# Altium PCB Evaluation kit.PcbDoc
Units mm, origin at the board's own origin, x right, y up, seen from the top; angles counter-clockwise.
Board outline 101.18 x 98.62 mm, 2 copper layers (Top Layer, Bottom Layer); 87 components, 56 nets, 195 pads, 0 vias.
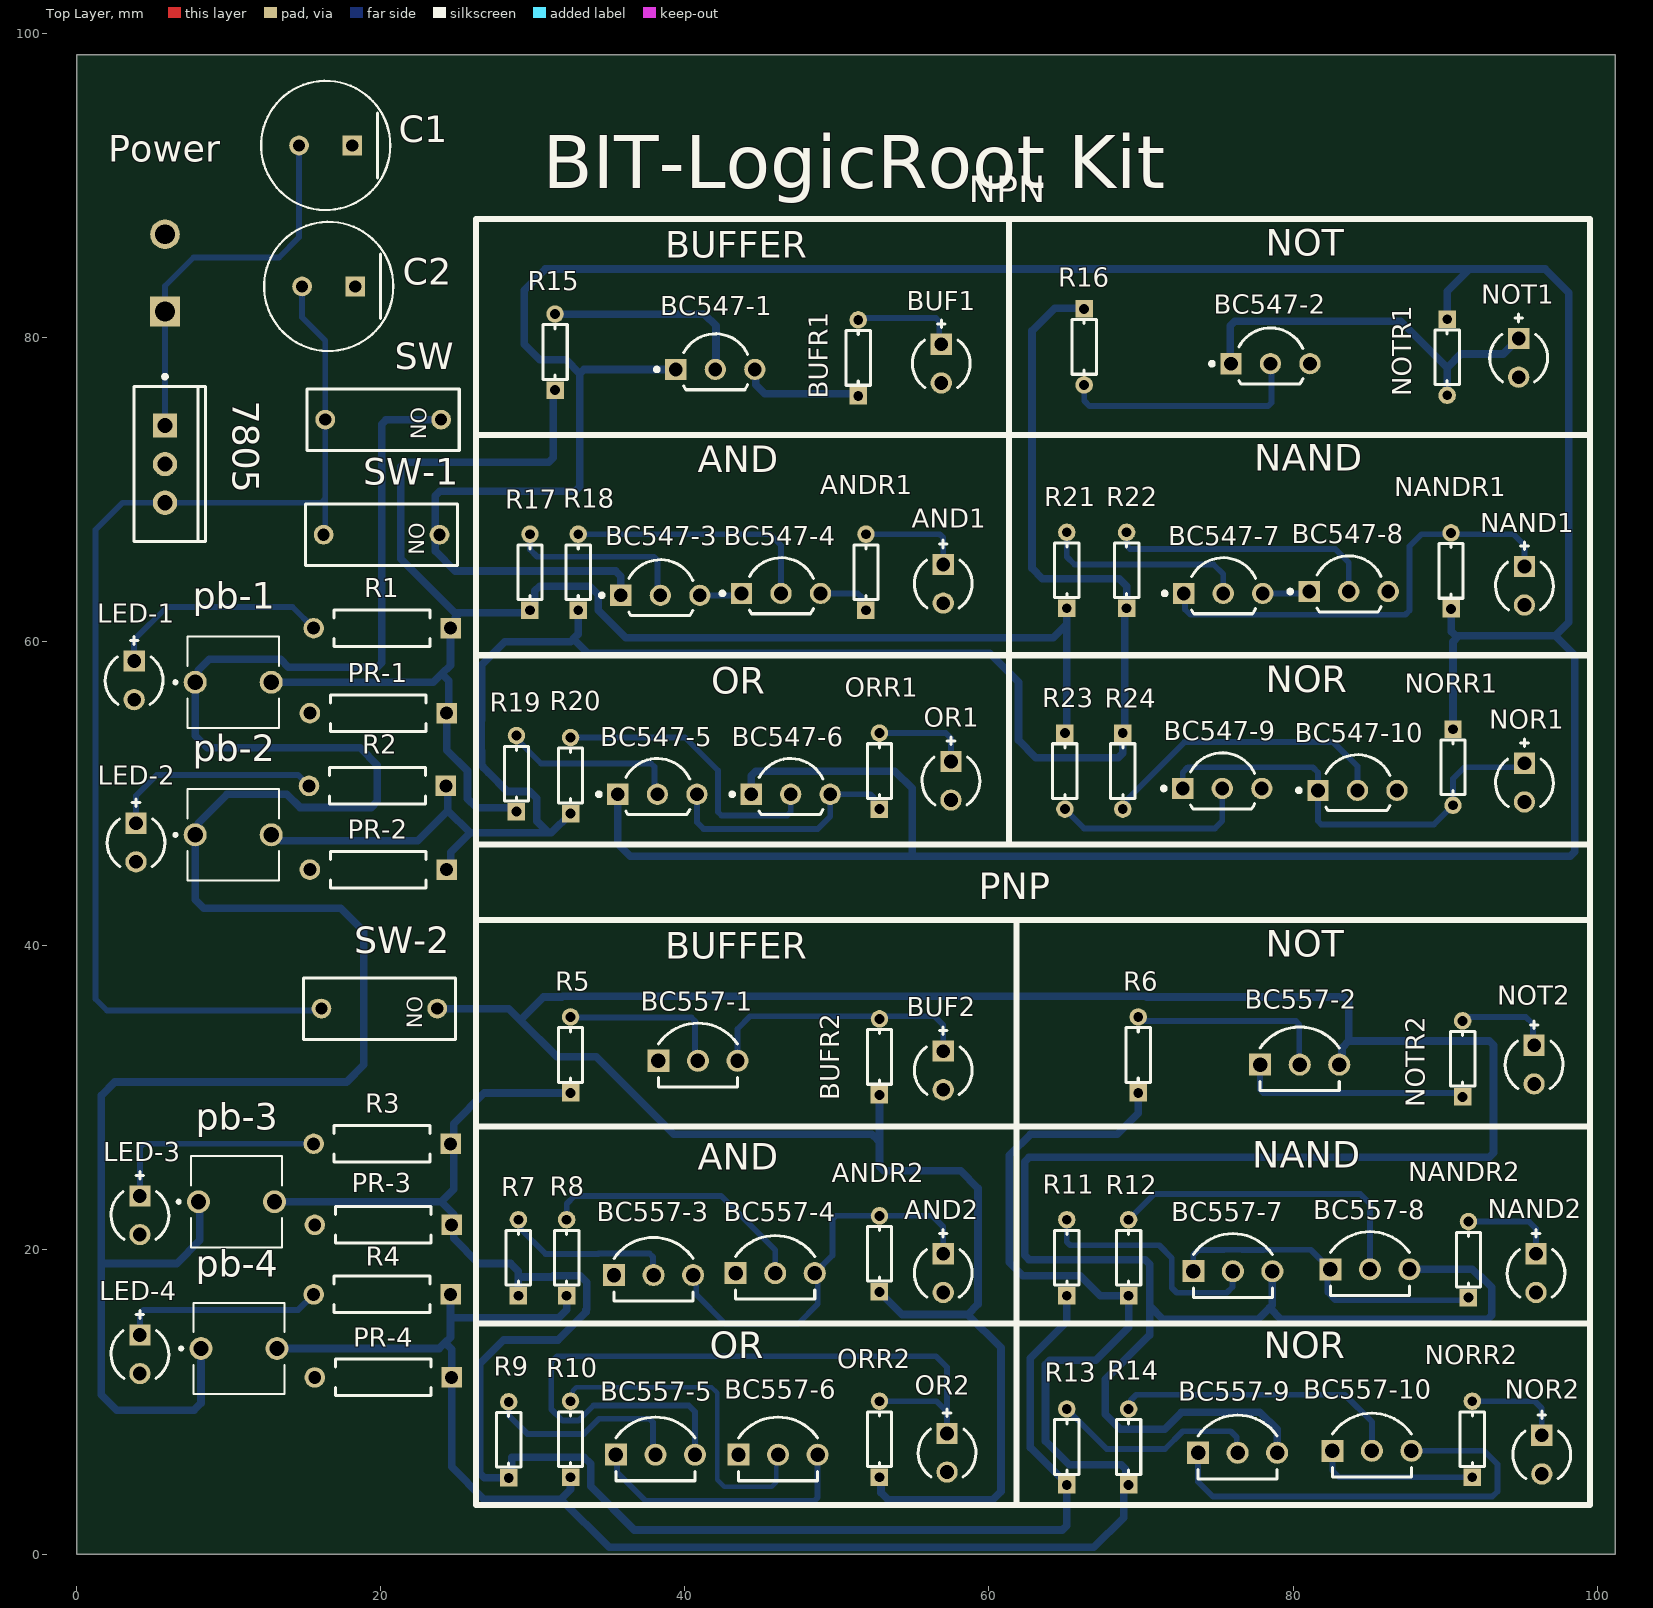
[diagram p0: Top Layer view]
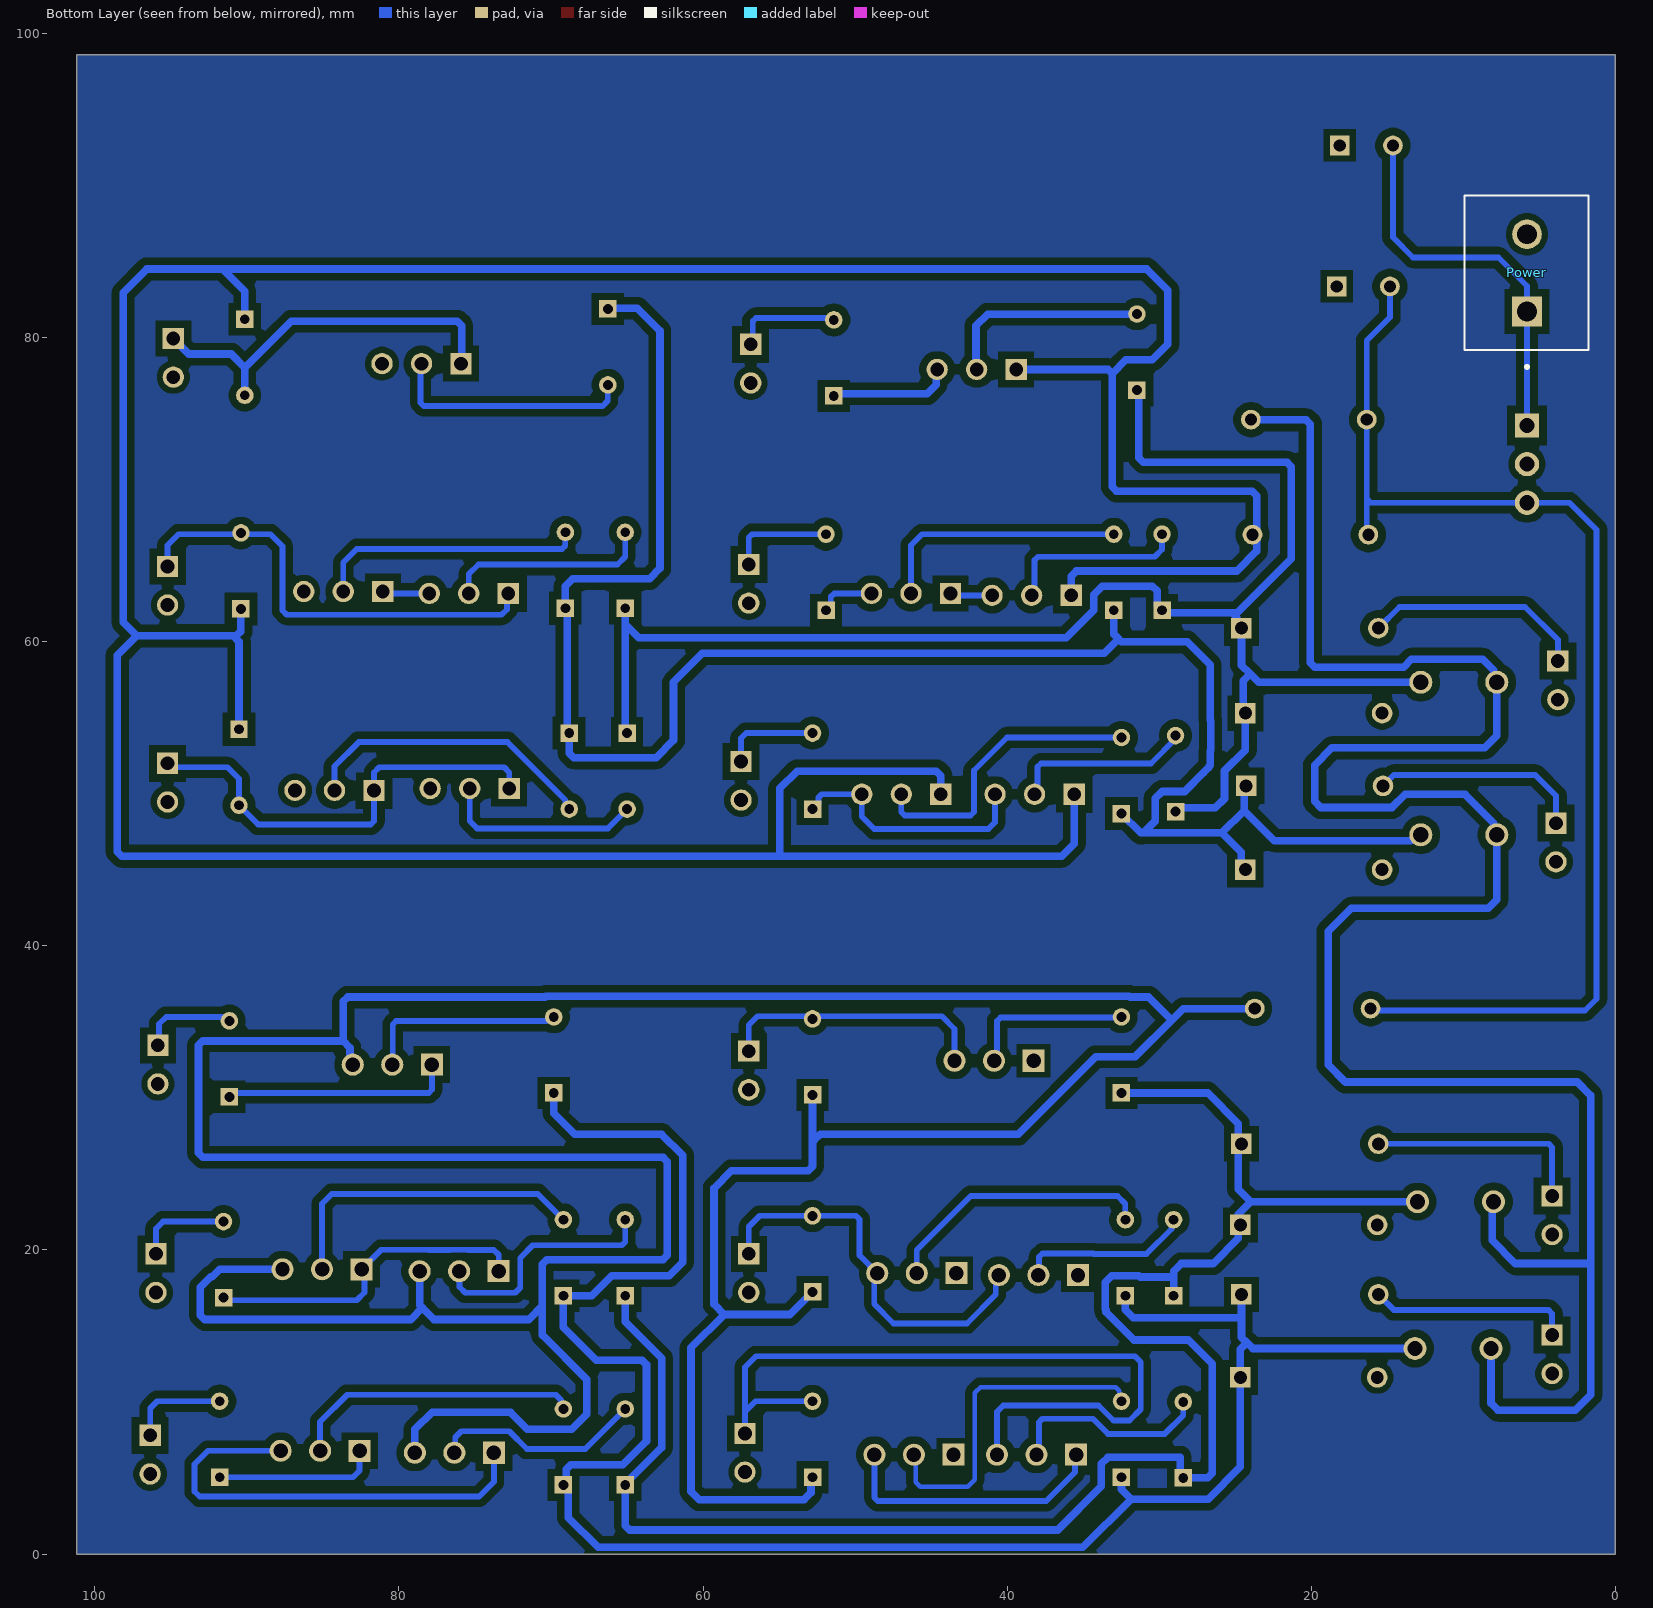
[diagram p1: Bottom Layer view, seen from below]
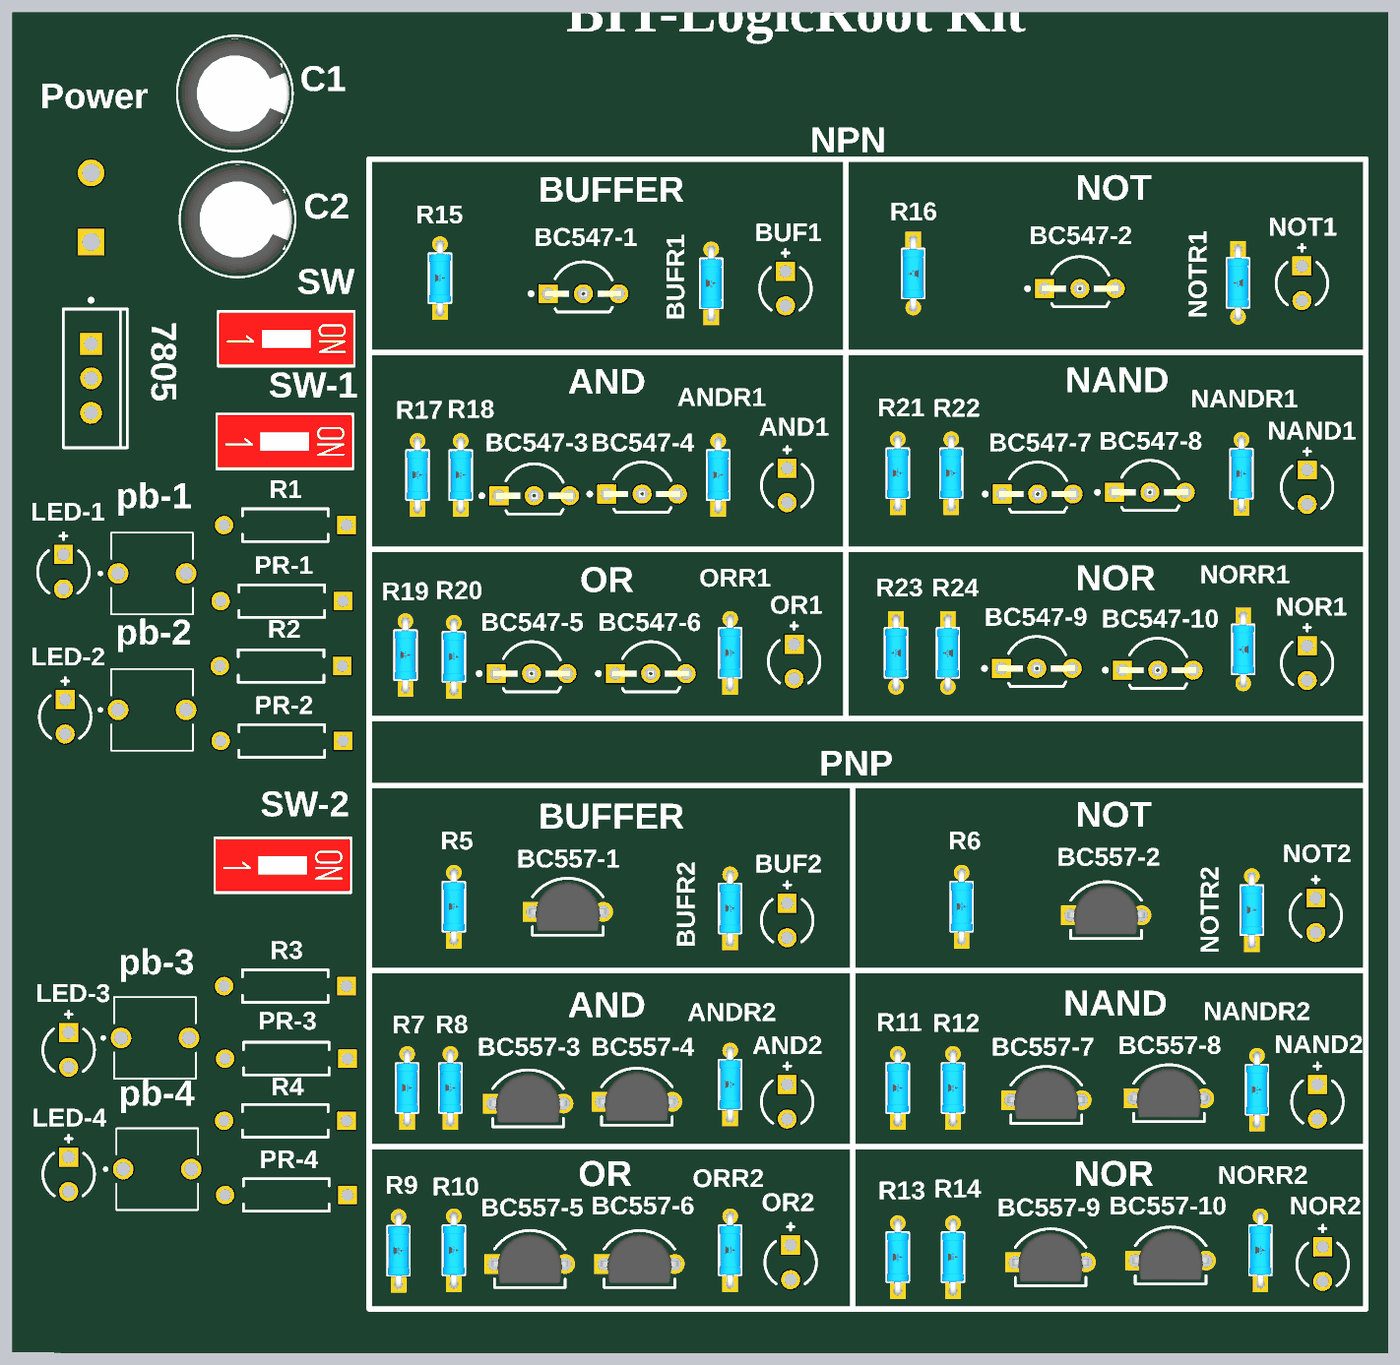
[diagram p2: 3D render of the assembled board from above, using the file's embedded part models]

## Layer stack, top to bottom
Top Solder: solder mask 0.0102, Solder Resist, Dk 3.5
Top Layer: signal copper 0.0356
Dielectric 1: dielectric 0.32, FR-4, Dk 4.8
Bottom Layer: signal copper 0.0356
Bottom Solder: solder mask 0.0102, Solder Resist, Dk 3.5

## Board outline
0.011,0 101.189,-0.012 101.189,98.603 0.011,98.603

## Design rules (kind name [scope] priority, off if disabled: settings)
Clearance [All] p1: gap=0.5 ignorepadtopadclearanceinfootprint=FALSE
PolygonConnect [All] p1: connectstyle=Relief reliefconductorwidth=0.5 reliefentries=4 polygonreliefangle="90 Angle" airgapwidth=0.4
RoutingVias [All] p1: holewidth=0.711 width=1.27 viastyle="Through Hole" minholewidth=0.711 minwidth=1.27 maxholewidth=0.711 maxwidth=1.27
SilkToSolderMaskClearance [IsPad] p1: minsilkscreentomaskgap=0 clearancetoexposedcopper=TRUE
SolderMaskExpansion [All] p1: expansion=0.102 istentingtop=FALSE
Width width [All] p1: maxlimit=0.5 minlimit=0.3 preferedwidth=0.3
Width vcc [All] p2: maxlimit=0.6 minlimit=0.5 preferedwidth=0.5
29 further rules are at their usual default settings.

## Components (designator, comment, footprint, x,y, rotation, side; value= is the part's Value field where it differs from the comment)
7805 "LM7805ACT" FAIR-TO-220-3 5.812,71.686 r0 top
AND1 "LTL-1CHE" INDPR60-254-520X380X650 56.993,63.812 r270 top
AND2 "LTL-1CHE" INDPR60-254-520X380X650 56.993,18.473 r270 top
ANDR1 "MBA02040C2200FC100" FP-MBA0204-MFG 51.913,64.574 r90 top value=220Ω
ANDR2 "MBA02040C2200FC100" FP-MBA0204-MFG 52.802,19.743 r90 top value=220Ω
BC547-1 "BC547BRL1G" ONSC-TO-92-3-29-11_AM_BL 42.007,77.909 r0 top
BC547-2 "BC547BRL1G" ONSC-TO-92-3-29-11_AM_BL 78.516,78.29 r0 top
BC547-3 "BC547BRL1G" ONSC-TO-92-3-29-11_AM_BL 38.391,63.05 r0 top
BC547-4 "BC547BRL1G" ONSC-TO-92-3-29-11_AM_BL 46.325,63.177 r0 top
BC547-5 "BC547BRL1G" ONSC-TO-92-3-29-11_AM_BL 38.197,49.969 r0 top
BC547-6 "BC547BRL1G" ONSC-TO-92-3-29-11_AM_BL 46.96,49.969 r0 top
BC547-7 "BC547BRL1G" ONSC-TO-92-3-29-11_AM_BL 75.408,63.177 r0 top
BC547-8 "BC547BRL1G" ONSC-TO-92-3-29-11_AM_BL 83.663,63.304 r0 top
BC547-9 "BC547BRL1G" ONSC-TO-92-3-29-11_AM_BL 75.348,50.35 r0 top
BC547-10 "BC547BRL1G" ONSC-TO-92-3-29-11_AM_BL 84.238,50.223 r0 top
BC557-1 "BC557BTF" FP-135AR-MFG 40.864,32.824 r90 top
BC557-2 "BC557BTF" FP-135AR-MFG 80.441,32.57 r90 top
BC557-3 "BC557BTF" FP-135AR-MFG 37.943,18.727 r90 top
BC557-4 "BC557BTF" FP-135AR-MFG 45.944,18.854 r90 top
BC557-5 "BC557BTF" FP-135AR-MFG 38.07,6.915 r90 top
BC557-6 "BC557BTF" FP-135AR-MFG 46.131,6.915 r90 top
BC557-7 "BC557BTF" FP-135AR-MFG 76.043,18.981 r90 top
BC557-8 "BC557BTF" FP-135AR-MFG 85.06,19.107 r90 top
BC557-9 "BC557BTF" FP-135AR-MFG 76.357,7.042 r90 top
BC557-10 "BC557BTF" FP-135AR-MFG 85.187,7.17 r90 top
BUF1 "LTL-1CHE" INDPR60-254-520X380X650 56.866,78.29 r270 top
BUF2 "LTL-1CHE" INDPR60-254-520X380X650 56.993,31.808 r270 top
BUFR1 "MBA02040C2200FC100" FP-MBA0204-MFG 51.405,78.671 r90 top value=220Ω
BUFR2 "MBA02040C2200FC100" FP-MBA0204-MFG 52.802,32.697 r90 top value=220Ω
C1 "EEU-FR1H101B" FP-EEU-FR1H101B-MFG 16.381,92.641 r180 top
C2 "EEU-FR1H101B" FP-EEU-FR1H101B-MFG 16.579,83.37 r180 top
LED-1 "LTL-1CHE" INDPR60-254-520X380X650 3.78,57.462 r270 top
LED-2 "LTL-1CHE" INDPR60-254-520X380X650 3.907,46.794 r270 top
LED-3 "LTL-1CHE" INDPR60-254-520X380X650 4.161,22.283 r270 top
LED-4 "LTL-1CHE" INDPR60-254-520X380X650 4.161,13.139 r270 top
NAND1 "LTL-1CHE" INDPR60-254-520X380X650 95.22,63.685 r270 top
NAND2 "LTL-1CHE" INDPR60-254-520X380X650 95.982,18.473 r270 top
NANDR1 "MBA02040C2200FC100" FP-MBA0204-MFG 90.394,64.661 r90 top value=220Ω
NANDR2 "MBA02040C2200FC100" FP-MBA0204-MFG 91.537,19.362 r90 top value=220Ω
NOR1 "LTL-1CHE" INDPR60-254-520X380X650 95.22,50.731 r270 top
NOR2 "LTL-1CHE" INDPR60-254-520X380X650 96.363,6.535 r270 top
NORR1 "MBA02040C2200FC100" FP-MBA0204-MFG 90.521,51.747 r270 top value=220Ω
NORR2 "MBA02040C2200FC100" FP-MBA0204-MFG 91.791,7.551 r90 top value=220Ω
NOT1 "LTL-1CHE" INDPR60-254-520X380X650 94.839,78.671 r270 top
NOT2 "LTL-1CHE" INDPR60-254-520X380X650 95.855,32.189 r270 top
NOTR1 "MBA02040C2200FC100" FP-MBA0204-MFG 90.14,78.711 r270 top value=220Ω
NOTR2 "MBA02040C2200FC100" FP-MBA0204-MFG 91.156,32.57 r90 top value=220Ω
OR1 "LTL-1CHE" INDPR60-254-520X380X650 57.501,50.858 r270 top
OR2 "LTL-1CHE" INDPR60-254-520X380X650 57.247,6.662 r270 top
ORR1 "MBA02040C2200FC100" FP-MBA0204-MFG 52.802,51.493 r90 top value=220Ω
ORR2 "MBA02040C2200FC100" FP-MBA0204-MFG 52.802,7.551 r90 top value=220Ω
pb-1 "BUTT-2" SW_BUTT-2 10.297,57.335 r0 top
pb-2 "BUTT-2" SW_BUTT-2 10.297,47.302 r0 top
pb-3 "BUTT-2" SW_BUTT-2 10.511,23.172 r0 top
pb-4 "BUTT-2" SW_BUTT-2 10.678,13.52 r0 top
Power "1729128" PHOENIX_1729128 1.762,79.179 r90 bottom
PR-1 "MFR-25FBF52-100R" RESA60-630X240 19.837,55.303 r180 top value=1K
PR-2 "MFR-25FBF52-100R" RESA60-630X240 19.837,45.016 r180 top value=1K
PR-3 "MFR-25FBF52-100R" RESA60-630X240 20.163,21.648 r180 top value=1K
PR-4 "MFR-25FBF52-100R" RESA60-630X240 20.163,11.615 r180 top value=1K
R1 "MFR-25FBF52-100R" RESA60-630X240 20.091,60.891 r180 top value=330
R2 "MFR-25FBF52-100R" RESA60-630X240 19.782,50.525 r180 top value=330
R3 "MFR-25FBF52-100R" RESA60-630X240 20.091,26.982 r180 top value=330
R4 "MFR-25FBF52-100R" RESA60-630X240 20.091,17.076 r180 top value=330
R5 "MBA02040C2200FC100" FP-MBA0204-MFG 32.482,32.824 r90 top value=220Ω
R6 "MBA02040C2200FC100" FP-MBA0204-MFG 69.82,32.824 r90 top value=220Ω
R7 "MBA02040C2200FC100" FP-MBA0204-MFG 29.053,19.489 r90 top value=220Ω
R8 "MBA02040C2200FC100" FP-MBA0204-MFG 32.228,19.489 r90 top value=220Ω
R9 "MBA02040C2200FC100" FP-MBA0204-MFG 28.418,7.511 r90 top value=220Ω
R10 "MBA02040C2200FC100" FP-MBA0204-MFG 32.482,7.551 r90 top value=220Ω
R11 "MBA02040C2200FC100" FP-MBA0204-MFG 65.121,19.489 r90 top value=220Ω
R12 "MBA02040C2200FC100" FP-MBA0204-MFG 69.185,19.489 r90 top value=220Ω
R13 "MBA02040C2200FC100" FP-MBA0204-MFG 65.121,7.043 r90 top value=220Ω
R14 "MBA02040C2200FC100" FP-MBA0204-MFG 69.185,7.043 r90 top value=220Ω
R15 "MBA02040C2200FC100" FP-MBA0204-MFG 31.466,79.052 r90 top value=220Ω
R16 "MBA02040C2200FC100" FP-MBA0204-MFG 66.264,79.393 r270 top value=220Ω
R17 "MBA02040C2200FC100" FP-MBA0204-MFG 29.815,64.574 r90 top value=220Ω
R18 "MBA02040C2200FC100" FP-MBA0204-MFG 32.99,64.574 r90 top value=220Ω
R19 "MBA02040C2200FC100" FP-MBA0204-MFG 28.926,51.326 r90 top value=220Ω
R20 "MBA02040C2200FC100" FP-MBA0204-MFG 32.482,51.199 r90 top value=220Ω
R21 "MBA02040C2200FC100" FP-MBA0204-MFG 65.121,64.701 r90 top value=220Ω
R22 "MBA02040C2200FC100" FP-MBA0204-MFG 69.058,64.701 r90 top value=220Ω
R23 "MBA02040C2200FC100" FP-MBA0204-MFG 64.994,51.493 r270 top value=220Ω
R24 "MBA02040C2200FC100" FP-MBA0204-MFG 68.804,51.493 r270 top value=220Ω
SW "418117170901" 418117170901 20.163,74.607 r270 top
SW-1 "418117170901" 418117170901 20.055,67.043 r270 top
SW-2 "418117170901" 418117170901 19.909,35.872 r270 top

## Footprints (in the part's own frame and the unit in brackets; to place one, negate y for a bottom-side part, rotate by r counter-clockwise, add the part's x,y. Pads: shape width x height; smd on the part's side, far side on the other; paste and mask are expansions set on the pad)
418117170901 [mm] "2.54 mm compact THT with flat actuator, 1p"
  round 1.3 hole 0.8: 1(0,-3.81) 2(0,3.81)
  silkscreen extent -2.02,-5 2.02,5, body extent -1.92,-4.95 1.92,4.95, height 5.75
FAIR-TO-220-3 [mm] "FM, 3-Leads, Body 10.2x4.7mm, Pitch 2.54mm"
  rect 1.6x1.6 hole 1: 1(0,2.54)
  round 1.6 hole 1: 2(0,0) 3(0,-2.54)
  silkscreen extent -2.04,-5.1 2.66,5.87, body extent -2.04,-5.1 2.66,5.1, height 18.95
FP-135AR-MFG [mm]
  rect 1.45x1.45 hole 0.95 paste-2539.97 mask+0: 1(-0.38,2.6)
  round 1.45 hole 0.95 paste-2539.97 mask+0: 2(-0.38,0) 3(-0.38,-2.6)
  silkscreen extent -2.09,-2.6 2.09,2.6, body extent -2.19,-3.42 2.19,3.42, height 0.25
FP-EEU-FR1H101B-MFG [mm]
  rect 1.3x1.3 hole 0.8 paste-2539.97 mask+0: 1(-1.75,0)
  round 1.3 hole 0.8 paste-2539.97 mask+0: 2(1.75,0)
  silkscreen extent -4.25,-4.25 4.25,4.25, body extent -4.35,-4.35 4.35,4.35, height 0.25
FP-MBA0204-MFG [mm]
  rect 1.15x1.15 hole 0.65 paste-2539.97 mask+0: 1(-2.5,0)
  round 1.15 hole 0.65 paste-2539.97 mask+0: 2(2.5,0)
  silkscreen extent -1.8,-0.8 1.8,0.8, body extent -3.17,-0.9 3.17,0.9, height 0.25
INDPR60-254-520X380X650 [mm] "THD, 2-Leads, Dia 3.8mm, Pitch 2.54mm"
  rect 1.4x1.4 hole 0.9: 1(-1.27,0)
  round 1.4 hole 0.9: 2(1.27,0)
  silkscreen extent -2.87,-1.9 1.58,1.9, body extent -1.9,-1.9 1.9,1.9, height 6.5
ONSC-TO-92-3-29-11_AM_BL [mm] "TO, 3-Leads, Body Dia 4.7mm, Pitch 2.6mm"
  rect 1.4x1.4 hole 0.9: 1(-2.6,0)
  round 1.4 hole 0.9: 2(0,0) 3(2.6,0)
  silkscreen extent -3.97,-1.34 2.13,2.35, body extent -2.84,-1.34 2.84,2.35, height 5.33
PHOENIX_1729128 [mm]
  rect 1.95x1.95 / inner round 1.95 / far side rect 1.95x1.95 hole 1.3: 1(2.54,4.05)
  round 1.95 hole 1.3: 2(7.62,4.05)
  silkscreen extent -1.2,0 10.16,8.15
RESA60-630X240 [mm] "Axial Resistor, 2-Leads, Dia 2.4mm, Body Length 6.3mm"
  rect 1.35x1.35 hole 0.85: 1(-4.5,0)
  round 1.35 hole 0.85: 2(4.5,0)
  silkscreen extent -3.15,-1.2 3.15,1.2, body extent -4.77,-1.19 4.77,1.2, height 2.4
SW_BUTT-2 [mm]
  round 1.508 hole 1: 1(-2.5,0) 2(2.5,0)
  silkscreen extent -3.9,-3 3,3

## Part data
7805: library part CMP-2000-04937-1, "Positive Voltage Regulator, 5 V, 1 A, 0 to 125 degC, 3-Pin TO-220, RoHS, Tube", Dropout Voltage Measurement Current=1A, Manufacturer=Fairchild, Maximum Input Voltage=35V, Maximum Operating Temperature=+125degC, Minimum Operating Temperature=0degC, Output Voltage=5V, Package Description="3-Pin Through Hole Device, Body 10 x 4.5 mm, Pitch 2.54 mm", Package Reference=TO-220, Quiescent Current=6mA, Typical Dropout Voltage @ Current=2V@1A, Datasheet URL=https://datasheet.ciiva.com/5816/1359194-5816420.pdf, Datasheet Version="Rev. 1.0.1, 05/2006", Dimensions=10.67x4.83x16.51mm, Height=16.51mm, Length=10.67mm, Line Regulation=50mV, Load Regulation=100mV, Manufacturer URL=https://www.fairchildsemi.com/, Maximum Output Current=1A, Mounting Type=ThroughHole, Number of Outputs=1, Output Type=Fixed, Package Type=TO-220, Package URL=https://www.fairchildsemi.com/package-drawings/TO/TO220B03.pdf, Pin Count=3, Polarity=Positive, Regulator Function=Linear, Series=LM78xx, Width=4.83mm
AND1 AND2 BUF1 BUF2 LED-1 LED-2 LED-3 LED-4 NAND1 NAND2 NOR1 NOR2 NOT1 NOT2 OR1 OR2: library part CMP-007-00018-2, "LED Uni-Color Red, 100 mW, 30 mA, -55 to 100 degC, 2-Pin THD, RoHS, Bulk", Case/Package=Radial, Colour=Red, Forward Current=20mA, Forward Voltage=2V, Manufacturer=Lite-On, Max Operating Temperature=100°C, Min Operating Temperature=-55°C, Package Description="2-Pin Through Hole Device, Dia 3.8 mm, Pitch 2.54 mm", Package Quantity=1000, Datasheet URL=https://datasheet.ciiva.com/15117/getdatasheetpartid-187746-15117985.pdf, Datasheet Version=Dec-03, Illumination Colour=Red, Lens Style=Dome, Luminous Intensity=12.6mcd, Manufacturer URL=http://www.us.liteon.com/, Mounting Technology=TH, Nominal Vf=2V, Package Reference=LTL-1CHE, Packaging=Bulk, Pins=2, RoHS Compliant=True, Viewing Angle=60degrees
ANDR1 ANDR2 BUFR1 BUFR2 NANDR1 NANDR2 NORR1 NORR2 NOTR1 NOTR2 ORR1 ORR2 R5 R6 R7 R8 R9 R10 R11 R12 R13 R14 R15 R16 R17 R18 R19 R20 R21 R22 R23 R24: library part CMP-02408-000005-1, "RES 220 OHM 0.4W 1% AXIAL", Manufacturer="Vishay BC Components", Package=MBA0204, Power Rating=0.25W, Resistance=220Ω, Temperature="-55°C to +125°C", Temperature Coefficient=50ppm/°C, Temperature Range High=+125°C, Temperature Range Low=-55°C, Tolerance=1%, Voltage Rating=200V, Automotive=Yes, Automotive Grade="Grade 1", Category=Res, ComponentLink2Description=Datasheet, ComponentLink2URL=http://www.vishay.com/docs/28766/mbxsma.pdf, Composition="Metal Film", Device Class L1="Passive Components", Device Class L2=Resistors, Device Class L3="Through-Hole Resistors", Digikey Description="RES 220 OHM 0.4W 1% AXIAL", Height=1.6mm, Ipc Land Pattern Name=RESAD500W65L360D160, Lead Free=Yes, Manufacturer Part Number=MBA02040C2200FC100, Mouser Description="Thin Film Resistors - Through Hole .4watt 220ohms 1% 1/8watt body size", Octopart=https://octopart.com/mba02040c2200fc100-vishay-43743094, RoHS=TRUE, Series="MBA/SMA 0204"
BC547-1 BC547-2 BC547-3 BC547-4 BC547-5 BC547-6 BC547-7 BC547-8 BC547-9 BC547-10: library part CMP-1048-01605-1, "Amplifier Transistor, NPN Silicon, 3-Pin TO-92, Pb-Free, Tape and Reel", Manufacturer="On Semiconductor", ComponentLink1Description="Manufacturer URL", ComponentLink1URL=http://www.onsemi.com/, ComponentLink2Description=Datasheet, ComponentLink2URL=http://www.onsemi.com/pub_link/Collateral/BC546-D.PDF, ComponentLink3Description="Package Specification", ComponentLink3URL=http://www.onsemi.com/pub_link/Collateral/MAC97-D.PDF, DatasheetVersion="Rev. 7", fT Min (MHz)=150, IC Continuous (A)=0.1, Mounting Technology="Through Hole", PackageDescription="3-Pin Transistor Outline, Body 4.825 x 3.685 mm, Pitch 1.27 mm", PackageReference=TO-92-3-29-11_AM_BL, PackageVersion="Rev. AM", Packing="Tape and Reel", PartNumber=BC547BRL1G, Polarity=NPN, RoHS=TRUE
BC557-1 BC557-2 BC557-3 BC557-4 BC557-5 BC557-6 BC557-7 BC557-8 BC557-9 BC557-10: library part CMP-00278-84408945-1, "BC557BTF Small Signal Bipolar Transistor, 0.1A I(C), 45V V(BR)CEO, 1-Element, PNP, Silicon, TO-92", Case/Package=TO-92, Collector Base Voltage (VCBO)=-50V, Collector Emitter Breakdown Voltage=45V, Collector Emitter Saturation Voltage=-250mV, Current Rating=-100mA, Emitter Base Voltage (VEBO)=-5V, Frequency=150MHz, Manufacturer Lifecycle Status=ACTIVE, Max Collector Current=100mA, Max Frequency=10MHz, Max Operating Temperature=150°C, Max Power Dissipation=500mW, Min Operating Temperature=-65°C, Voltage Rating (DC)=-45V, Collector Emitter Voltage (VCEO)=45V, Contact Plating=Tin, Element Configuration=Single, Gain Bandwidth Product=150MHz, Height=5.33mm, hFE Min=110, Lead Free="Lead Free", Length=5.2mm, Lifecycle Status=Production, Max Breakdown Voltage=45V, Mount="Through Hole", NexarPartId=84408945, Number of Elements=1, Number of Pins=3, Polarity=PNP, Power Dissipation=500mW, REACH SVHC="No SVHC", RoHS=Compliant, Schedule B="8541210080, 8541210080", Transition Frequency=150MHz, Weight=240mg, Width=4.19mm
C1 C2: library part CMP-05427-000020-1, "CAP ALUM 100UF 20% 50V RADIAL", Capacitance=100uF, Case/Package=Radial, ESR (Equivalent Series Resistance)=61mR, Max Operating Temperature=105°C, Min Operating Temperature=-40°C, Package Quantity=1, Ripple Current=870mA, Tolerance=20%, Voltage Rating=50V, Contact Plating=Tin, Diameter=8mm, Features="General Purpose", Height=11.5mm, Height - Seated (Max)=0.512inch, Impedance=61mR, Lead Diameter=0.6mm, Lead Free="Lead Free", Lead Pitch=5mm, Length=11.5mm, Life (Hours)=6000Hour, Mount="Through Hole", Packaging="Tape and Reel", Radiation Hardening=No, REACH SVHC="No SVHC", RoHS Compliant=Yes, Series=FR, Termination=Radial, Voltage Rating (DC)=50V
pb-1 pb-2 pb-3 pb-4: "Tactile Switches MINI PUSH BUTTON SWITCH 2-PIN QTY. 4", Package=None, Availability="In Stock", Check_prices=https://www.snapeda.com/parts/BUTT-2/Gravitech/view-part/?ref=eda, MF=Gravitech, MP=BUTT-2, Price=None, Purchase-URL=https://pricing.snapeda.com/search/part/BUTT-2/?ref=eda, SnapEDA_Link=https://www.snapeda.com/parts/BUTT-2/Gravitech/view-part/?ref=snap
Power: "PCB Terminal Screw 5.08mm 16AWG 400V 13.5A 2 Position COMBICON MKDSN Series", Package=None, Check_prices=https://www.snapeda.com/parts/1729128/Phoenix+Contact/view-part/?ref=eda, MF="Phoenix Contact", MP=1729128, SnapEDA_Link=https://www.snapeda.com/parts/1729128/Phoenix+Contact/view-part/?ref=snap
PR-1 PR-2 PR-3 PR-4 R1 R2 R3 R4: library part CMP-009-00046-4, "Axial Resistor, 100 Ohm, +/- 1%, 0.25 W, -55 to 155 degC, 2-Pin THD, RoHS, Bulk", Case/Package=Axial, Manufacturer=Yageo, Max Operating Temperature=155°C, Min Operating Temperature=-55°C, Package Description="2-Pin Axial Lead, Dia 2.4 mm, Body Length 6.3 mm", Package Quantity=200, Package Reference=MFR-25, Power=250mW, Tolerance=1%, Voltage Rating=250V, Composition=CarbonFilm, Datasheet URL=http://www.yageo.com/documents/recent/Yageo%20LR_MFR_2013.pdf, Datasheet Version=Apr-13, Manufacturer URL=http://www.yageo.com/, Mounting Technology=TH, Packaging=Bulk, RoHS Compliant=True
SW SW-1 SW-2: "WS-DITV Compact THT Dip Switch, Flat Actuator, pitch 2.54mm, 1p", Manufacturer="Wurth Elektronik", Operating Temperature Max=85°C, Operating Temperature Min=-40°C, Rated Current Non-Switching=100mA, Rated Current Switching=25mA, Rated Voltage Non-Switching=50VDC, Rated Voltage Switching=24VDC, Actuator Type="Flat Type", Category="Dip Switches", ComponentLink1Description="Website Link", ComponentLink1URL=https://www.we-online.com/redexpert/article/418117170901?ad, ComponentLink2Description="Datasheet Link", ComponentLink2URL=https://www.we-online.com/redexpert/spec/418117170901?ad, Contact Material="Copper Alloy", Contact Plating=Gold, Manufacturer Part Number=418117170901, Match Code=WS-DITV, Mount="Through Hole", Number of Poles=1, Operation Force=800g, Packaging=Tube, Pitch=2.54mm

## Nets (pads, with @x,y where several pads share a name; then routed paths per layer and width w, separated by ;. In a path a pad name is that pad's centre, name@x,y a point inside that pad or via, vN(x,y) a via of type N, cw(c..) or ccw(c..) an arc to the next point about the centre after c; other vN are vias at no path point)
GND: 7805.2 AND1.2 AND2.2 BC547-2.3 BC547-8.3 BC547-9.3 BC547-10.3 BC557-1.1 BC557-3.1 BC557-4.1 BC557-6.1 BUF1.2 BUF2.2 C1.1 C2.1 LED-1.2 LED-2.2 LED-3.2 LED-4.2 NAND1.2 NAND2.2 NOR1.2 NOR2.2 NOT1.2 NOT2.2 OR1.2 OR2.2 Power.2 PR-1.2 PR-2.2 PR-3.2 PR-4.2
Net7805_1: 7805.1 C1.2 Power.1 | length 25.4
  Bottom Layer w0.381: 7805.1 Power.1 5.812,83.401 7.685,85.275 13.305,85.275 14.631,86.601 C1.2
Net7805_3: 7805.3 C2.2 SW-1.1 SW-2.1 SW.1 | length 79.4
  Bottom Layer w0.381: C2.2 14.829,81.338 16.353,79.814 SW.1 16.353,69.4 ; SW-1.1 16.353,67.151 16.353,69.4 ; SW-2.1@16.526,35.745 2.002,35.745 1.24,36.507 1.24,67.368 3.018,69.146 16.099,69.146 16.353,69.4
NetAND1_1: AND1.1 ANDR1.2 | length 7.2
  Bottom Layer w0.381: ANDR1.2 56.769,67.074 56.993,66.851 AND1.1@56.993,64.805
NetAND2_1: AND2.1 ANDR2.2 BC557-3.3 BC557-4.3 | length 26.3
  Bottom Layer w0.381: BC557-3.3 40.747,18.143 40.747,17.066 42.642,15.171 47.468,15.171 48.738,16.441 48.738,18.28 BC557-4.3 49.714,19.644 49.714,22.02 49.937,22.243 ANDR2.2 56.271,22.243 56.993,21.521 AND2.1
NetANDR1_1: ANDR1.1 BC547-4.3 | length 3.8
  Bottom Layer w0.381: BC547-4.3 51.373,63.177 51.596,62.954 51.596,62.391 ANDR1.1
NetBC547-1_2: BC547-1.2 R15.2 | length 13.8
  Bottom Layer w0.5: R15.2 41.285,81.552 42.053,80.784 BC547-1.2@42.053,77.877
NetBC547-1_3: BC547-1.3 BUFR1.1 | length 8.1
  Bottom Layer w0.381: BUFR1.1@51.278,76.298 BUFR1.1
  Bottom Layer w0.5: BC547-1.3 44.657,77.859 44.657,76.91 45.269,76.298 48.103,76.298 BUFR1.1@51.278,76.298
NetBC547-2_1: BC547-2.1 NOT1.1 NOTR1.2 | length 25.6
  Bottom Layer w0.5: BC547-2.1@75.862,78.148 75.862,80.792 76.155,81.084 87.092,81.084 90.14,78.036 ; NOTR1.2 90.14,78.036 ; NOT1.1 93.823,78.925 91.029,78.925 90.14,78.036
NetBC547-2_2: BC547-2.2 R16.2 | length 15.9
  Bottom Layer w0.381: R16.2 66.264,75.854 66.621,75.496 78.359,75.496 78.583,75.72 BC547-2.2@78.583,77.995
NetBC547-3_2: BC547-3.2 R17.2 | length 12.1
  Bottom Layer w0.381: R17.2 29.815,66.068 30.291,65.591 37.972,65.591 38.196,65.368 38.196,63.245 BC547-3.2
NetBC547-3_3: BC547-3.3 BC547-4.1 | length 2.8
  Bottom Layer w0.381: BC547-3.3 43.598,63.05 BC547-4.1
NetBC547-4_2: BC547-4.2 R18.2 | length 16.8
  Bottom Layer w0.381: R18.2 45.603,67.074 46.325,66.352 BC547-4.2
NetBC547-5_2: BC547-5.2 R19.2 | length 11.9
  Bottom Layer w0.381: R19.2 28.926,53.618 30.542,52.001 37.778,52.001 38.002,51.778 38.002,50.164 BC547-5.2
NetBC547-5_3: BC547-5.3 BC547-6.3 ORR1.1 | length 16.4
  Bottom Layer w0.381: BC547-5.3 40.797,48.131 41.237,47.691 48.746,47.691 49.56,48.505 BC547-6.3 52.194,49.969 52.417,49.746 52.417,49.378 ORR1.1
NetBC547-6_2: BC547-6.2 R20.2 | length 19.5
  Bottom Layer w0.381: R20.2 40.018,53.699 42.187,51.53 42.187,48.796 42.41,48.572 46.736,48.572 46.96,48.796 BC547-6.2
NetBC547-7_1: BC547-7.1 NAND1.1 NANDR1.2 | length 29.9
  Bottom Layer w0.381: BC547-7.1 72.9,63.085 72.9,62.129 73.249,61.78 87.376,61.78 87.653,62.057 87.653,66.279 88.449,67.074 90.013,67.074 94.498,67.074 95.22,66.352 NAND1.1
NetBC547-7_2: BC547-7.2 R21.2 | length 13.7
  Bottom Layer w0.381: R21.2 65.121,65.59 65.629,65.082 74.773,65.082 75.406,64.449 75.406,63.43 75.281,63.304 BC547-7.2
NetBC547-7_3: BC547-7.3 BC547-8.1 | length 3.1
  Bottom Layer w0.381: BC547-7.3 80.936,63.177 BC547-8.1
NetBC547-8_2: BC547-8.2 R22.2 | length 17.9
  Bottom Layer w0.381: R22.2 69.058,66.322 69.281,66.098 82.774,66.098 83.663,65.209 BC547-8.2
NetBC547-9_1: BC547-9.1 BC547-10.1 NOR1.1 NORR1.2 | length 29.9
  Bottom Layer w0.381: BC547-9.1 72.748,51.405 73.083,51.741 81.302,51.741 81.638,51.405 BC547-10.1 81.638,48.212 81.861,47.989 89.262,47.989 NORR1.2 90.521,50.985 91.283,51.747 95.093,51.747 NOR1.1@95.347,52.001
NetBC547-9_2: BC547-9.2 R23.2 | length 13.2
  Bottom Layer w0.381: R23.2 66.259,47.728 74.863,47.728 75.348,48.212 BC547-9.2
NetBC547-10_2: BC547-10.2 R24.2 | length 19.7
  Bottom Layer w0.381: R24.2 68.804,49.202 69.063,49.461 69.063,49.594 72.868,53.398 82.647,53.398 84.238,51.807 BC547-10.2
NetBC557-1_2: BC557-1.2 R5.2 | length 11
  Bottom Layer w0.381: R5.2 32.525,35.281 40.436,35.281 40.659,35.058 40.659,32.649 BC557-1.2
NetBC557-1_3: BC557-1.3 BUF2.1 BUFR2.2 | length 17.9
  Bottom Layer w0.381: BC557-1.3 43.464,34.535 44.293,35.364 47.341,35.364 56.417,35.364 56.993,34.789 BUF2.1
NetBC557-2_1: BC557-2.1 NOTR2.1 | length 15.5
  Bottom Layer w0.381: BC557-2.1@77.821,32.508 77.821,30.548 78.044,30.324 90.902,30.324 NOTR2.1
NetBC557-2_2: BC557-2.2 R6.2 | length 13.4
  Bottom Layer w0.381: R6.2 70.028,35.324 70.294,35.058 80.189,35.058 80.412,34.835 BC557-2.2@80.412,32.19
NetBC557-3_2: BC557-3.2 R7.2 | length 11.4
  Bottom Layer w0.381: R7.2 29.2,21.842 29.2,21.374 30.831,19.743 34.312,19.743 34.332,19.763 37.672,19.763 37.915,19.52 37.915,18.375 BC557-3.2
NetBC557-4_2: BC557-4.2 R8.2 | length 18
  Bottom Layer w0.381: R8.2 32.228,23.045 32.736,23.553 42.388,23.553 45.944,19.997 BC557-4.2
NetBC557-5_1: BC557-5.1 BC557-6.3 | length 17.9
  Bottom Layer w0.381: BC557-5.1@35.53,6.381 35.53,5.392 37.435,3.487 48.507,3.487 48.731,3.711 BC557-6.3
NetBC557-5_2: BC557-5.2 R9.2 | length 13.7
  Bottom Layer w0.381: R9.2 28.418,9.118 29.63,7.905 33.371,7.905 34.36,8.894 37.685,8.894 37.908,8.671 BC557-5.2@37.908,6.408
NetBC557-5_3: BC557-5.3 OR2.1 ORR2.2 | length 51.9
  Bottom Layer w0.381: BC557-5.3 40.67,9.36 40.254,9.775 33.995,9.775 33.006,8.786 31.957,8.786 31.216,9.527 31.216,12.636 31.593,13.012 56.521,13.012 57.247,12.287 57.247,9.355 ; ORR2.2 56.55,10.051 57.247,9.355 ; OR2.1 57.247,9.355
NetBC557-6_2: BC557-6.2 R10.2 | length 22.4
  Bottom Layer w0.3: R10.2 32.629,10.199 32.629,10.747 32.863,10.98 41.753,10.98 42.134,10.599 42.134,4.884 42.59,4.428 45.713,4.428 46.004,4.719 BC557-6.2@46.004,6.662
NetBC557-7_1: BC557-7.1 BC557-8.1 NANDR2.1 | length 21.9
  Bottom Layer w0.381: BC557-7.1 73.443,19.683 73.765,20.005 75.445,20.005 75.456,20.017 76.629,20.017 76.64,20.005 78.045,20.005 78.056,20.017 81.17,20.017 BC557-8.1 82.266,18.533 82.266,17.203 82.774,16.695 91.37,16.695 NANDR2.1
NetBC557-7_2: BC557-7.2 R11.2 | length 16.1
  Bottom Layer w0.381: R11.2 65.121,20.526 65.344,20.303 71.199,20.303 72.027,19.475 72.027,17.507 72.348,17.186 75.644,17.186 76.015,17.557 76.015,18.574 BC557-7.2
NetBC557-8_2: BC557-8.2 R12.2 | length 21.2
  Bottom Layer w0.381: R12.2 70.876,23.68 84.425,23.68 85.06,23.045 BC557-8.2
NetBC557-9_1: BC557-9.1 BC557-10.3 | length 29.9
  Bottom Layer w0.381: BC557-9.1 73.757,4.757 74.728,3.786 93.105,3.786 93.442,4.122 93.442,5.9 92.552,6.79 BC557-10.3
NetBC557-9_2: BC557-9.2 R13.2 | length 14
  Bottom Layer w0.381: R13.2 65.126,9.543 67.753,6.916 71.584,6.916 72.746,8.078 75.897,8.078 76.299,7.676 76.299,6.72 BC557-9.2
NetBC557-10_1: BC557-10.1 NORR2.1 | length 10.7
  Bottom Layer w0.381: BC557-10.1 82.587,5.492 83.027,5.051 NORR2.1
NetBC557-10_2: BC557-10.2 R14.2 | length 19.3
  Bottom Layer w0.381: R14.2 69.332,9.691 69.332,10.112 69.693,10.472 83.409,10.472 85.187,8.694 BC557-10.2
NetBUF1_1: BUF1.1 BUFR1.2 | length 7
  Bottom Layer w0.381: BUFR1.2@51.405,81.298 56.515,81.298 56.739,81.075 BUF1.1@56.739,79.454
NetLED-1_1: LED-1.1 R1.2 | length 14.7
  Bottom Layer w0.381: LED-1.1 3.78,60.129 5.939,62.288 14.194,62.288 R1.2
NetLED-2_1: LED-2.1 R2.2 | length 13.4
  Bottom Layer w0.381: LED-2.1@3.907,48.699 3.907,49.873 5.273,51.239 14.567,51.239 R2.2
NetLED-3_1: LED-3.1 R3.2 | length 14
  Bottom Layer w0.381: 4.161,24.315 4.161,26.759 4.384,26.982 R3.2
NetLED-4_1: LED-4.1 R4.2 | length 13.4
  Bottom Layer w0.381: LED-4.1 4.161,15.806 4.415,16.06 14.575,16.06 R4.2
NetNAND2_1: NAND2.1 NANDR2.2 | length 6.3
  Bottom Layer w0.381: NANDR2.2 95.514,21.862 95.982,21.394 NAND2.1
NetNOR2_1: NOR2.1 NORR2.2 | length 6.5
  Bottom Layer w0.381: NORR2.2 95.895,10.051 96.363,9.583 NOR2.1
NetNOT2_1: NOT2.1 NOTR2.2 | length 6.3
  Bottom Layer w0.381: NOTR2.2 91.41,35.324 95.307,35.324 95.775,34.856 95.775,33.539 NOT2.1
NetOR1_1: OR1.1 ORR1.2 | length 6.4
  Bottom Layer w0.381: ORR1.2 57.16,53.993 57.501,53.652 OR1.1
NP1: pb-1.2 PR-1.1 R1.1 R15.1 R17.1 R19.1 R21.1 R23.1 | length 106.4
  Bottom Layer w0.5: pb-1.2 23.465,57.335 24.028,57.898 ; PR-1.1 24.337,52.881 25.707,51.511 25.707,49.683 26.309,49.08 28.672,49.08 R19.1 ; PR-1.1@24.409,55.557 24.481,55.629 24.481,57.445 24.028,57.898 ; R15.1@31.339,76.728 31.339,72.106 31.046,71.813 21.598,71.813 21.306,71.521 21.306,65.463 24.862,61.907 25.19,61.907 ; R23.1 65.121,54.12 65.121,61.145 ; R21.1 65.121,61.145 ; 24.028,57.898 24.591,58.461 24.591,60.51 24.897,60.817 24.897,61.615 25.026,61.743 25.19,61.907 ; 25.19,61.907 29.648,61.907 R17.1 30.14,62.399 30.14,63.341 30.45,63.651 33.74,63.651 34.315,63.076 34.315,62.066 36.124,60.256 64.232,60.256 65.121,61.145
NP2: pb-2.2 PR-2.1 R2.1 R16.1 R18.1 R20.1 R22.1 R24.1 | length 127.9
  Bottom Layer w0.5: pb-2.2 13.069,47.302 13.45,46.921 22.447,46.921 24.419,48.894 25.878,47.435 25.878,47.429 ; PR-2.1 24.597,45.277 24.597,46.149 25.878,47.429 ; 24.409,48.904 R2.1@24.409,50.223 ; R20.1 31.212,47.429 31.033,47.429 ; R18.1 32.99,60.51 32.736,60.256 ; R16.1@66.264,81.933 64.319,81.933 62.835,80.449 62.835,64.828 63.521,64.142 68.562,64.142 69.058,63.647 R22.1 68.931,62.074 68.931,54.12 R24.1 68.804,52.675 68.511,52.382 63.089,52.382 61.946,53.525 61.946,57.335 60.041,59.24 33.625,59.24 32.736,60.129 32.736,60.256 ; 25.878,47.429 31.033,47.429 ; 31.033,47.429 30.251,48.212 30.251,49.712 29.811,50.151 28.311,50.151 27.059,51.403 26.731,51.731 26.731,51.783 26.64,51.874 26.64,52.824 26.601,52.863 26.601,54.789 26.64,54.828 26.64,58.478 28.164,60.002 32.482,60.002 32.736,60.256
PN1: pb-3.2 PR-3.1 R3.1 R5.1 R7.1 R9.1 R11.1 R13.1 | length 116.8
  Bottom Layer w0.5: pb-3.2 23.973,23.172 ; R7.1 29.053,18.219 ; R5.1 26.807,30.324 24.79,28.307 24.79,26.982 24.79,23.989 23.973,23.172 ; R11.1 65.121,15.277 62.724,12.88 62.724,7.01 64.796,4.938 64.796,4.868 R13.1 65.121,1.875 64.828,1.582 36.673,1.582 33.807,4.448 33.807,5.937 33.367,6.376 28.615,6.376 28.615,5.208 R9.1 26.805,5.011 26.513,5.304 26.513,12.504 28.088,14.08 31.661,14.08 33.498,15.916 33.498,16.049 33.553,16.104 33.553,17.875 33.113,18.314 31.342,18.314 31.247,18.219 29.053,18.219 ; 23.973,23.172 24.79,22.355 24.79,20.759 26.441,19.108 28.545,19.108 29.053,18.6 29.053,18.219
PN2: pb-4.2 PR-4.1 R4.1 R6.1 R8.1 R10.1 R12.1 R14.1 | length 130.3
  Bottom Layer w0.5: pb-4.2 23.846,13.52 24.227,13.901 ; R4.1 24.591,15.569 ; R8.1 32.228,16.06 31.72,15.552 24.608,15.552 24.591,15.569 ; R10.1 32.482,4.757 32.482,4.249 31.847,3.614 ; R6.1 69.82,28.999 68.427,27.607 62.737,27.607 61.344,26.215 61.344,19.193 62.223,18.314 66.006,18.314 67.331,16.989 R12.1 69.185,14.917 67.026,12.758 64.016,12.758 63.724,12.466 63.724,7.424 65.28,5.868 68.713,5.868 69.006,5.576 69.006,4.722 R14.1 68.86,4.218 68.86,2.4 66.899,0.439 35.022,0.439 31.847,3.614 ; 24.227,13.901 24.591,14.265 24.591,15.569 ; 24.227,13.901 24.663,13.465 PR-4.1 24.663,5.74 26.788,3.614 31.847,3.614
VCC: pb-1.1 pb-2.1 pb-3.1 pb-4.1 SW.2 | length 149.2
  Bottom Layer w0.5: pb-3.1 8.098,23.085 8.098,20.632 6.574,19.108 1.621,19.108 ; pb-4.1 8.178,9.917 7.717,9.456 2.637,9.456 1.621,10.472 1.621,19.108 ; SW.2@23.99,74.607 20.348,74.607 20.055,74.315 20.055,58.628 19.762,58.335 13.923,58.335 13.419,58.839 8.713,58.839 7.989,58.116 7.989,57.528 pb-1.1 7.797,53.826 8.606,53.017 18.639,53.017 19.782,51.874 19.782,49.5 19.381,49.1 14.691,49.1 13.822,49.969 9.89,49.969 7.989,48.069 7.989,47.495 pb-2.1 7.797,43.031 8.352,42.476 17.369,42.476 18.893,40.952 18.893,32.189 17.75,31.046 2.51,31.046 1.621,30.157 1.621,19.108
VCC-1: BC547-1.1 BC547-3.1 BC547-5.1 BC547-6.1 NANDR1.1 NORR1.1 NOTR1.1 SW-1.2 | length 259.2
  Bottom Layer w0.5: BC547-5.1 35.597,46.727 36.419,45.905 54.961,45.905 ; BC547-3.1 35.791,64.313 35.453,64.651 24.912,64.651 23.592,65.971 23.592,69.616 23.884,69.908 32.808,69.908 33.101,70.201 33.101,77.639 ; BC547-1.1 33.371,77.909 33.101,77.639 ; BC547-6.1 44.36,51.201 44.652,51.493 53.818,51.493 54.961,50.35 54.961,45.905 ; NOTR1.1 90.14,83.055 91.597,84.513 ; NANDR1.1 90.394,60.676 90.686,60.383 90.902,60.383 ; NORR1.1 90.521,60.002 90.902,60.383 ; 33.101,77.639 32.196,78.544 30.45,78.544 29.434,79.56 29.434,83.116 30.831,84.513 91.597,84.513 ; 54.961,45.905 98.229,45.905 98.522,46.198 98.522,59.113 97.252,60.383 ; 90.902,60.383 97.252,60.383 ; 91.597,84.513 96.578,84.513 98.141,82.951 98.141,61.272 97.252,60.383
VCC-2: ANDR2.1 BC557-2.3 BC557-7.3 BC557-8.3 BC557-9.3 BUFR2.1 ORR2.1 SW-2.2 | length 262.4
  Bottom Layer w0.5: SW-2.2 28.418,35.872 29.18,35.11 ; 52.675,27.236 52.294,27.617 39.266,27.617 34.186,32.697 31.593,32.697 29.18,35.11 ; ORR2.1 52.905,4.948 52.905,4.019 53.363,3.561 60.242,3.561 60.796,4.115 60.796,13.562 58.604,15.753 ; ANDR2.1 54.292,15.753 58.604,15.753 ; BUFR2.1 52.802,25.497 53.094,25.204 58.136,25.204 59.279,24.061 59.279,16.428 58.604,15.753 ; BC557-7.3 78.643,16.374 78.456,16.187 ; BC557-9.3 78.957,8.193 77.821,9.329 72.667,9.329 71.556,8.218 68.636,8.218 67.652,9.202 67.652,11.48 70.582,14.409 70.582,16.314 ; BC557-2.3 83.222,32.372 83.222,33.305 83.663,33.745 ; BC557-8.3 91.791,18.727 92.28,18.238 92.372,18.238 93.061,17.549 93.061,15.718 92.768,15.425 79.218,15.425 78.456,16.187 ; 29.18,35.11 30.704,36.634 31.918,36.634 31.973,36.689 70.328,36.689 70.383,36.634 83.37,36.634 83.663,36.342 83.663,33.745 ; 70.582,16.314 70.582,19.07 70.289,19.362 62.637,19.362 62.344,19.655 62.344,25.801 62.637,26.093 92.895,26.093 93.188,26.386 93.188,33.453 92.895,33.745 83.663,33.745 ; 70.582,16.314 71.471,15.425 77.694,15.425 78.456,16.187

## Polygon pours and split planes (outlines as drawn)
GND on Bottom Layer "GND_L02_P000" (solid, pour order 0): -0.01,98.595 101.115,98.595 101.115,-0.109 101.031,-0.025 0.018,-0.025 0.018,98.57 -0.01,98.598

## Silkscreen, mask and mechanical layers (free items; w line width, h text height)
Top Overlay:
  lines w0.4: 26.259,15.171 99.538,15.171 ; 26.259,28.125 99.411,28.125 ; 26.259,73.591 99.538,73.591 ; 26.259,87.307 26.259,3.233 ; 26.386,59.113 99.538,59.113 ; 61.311,46.794 61.311,87.815 ; 61.819,3.36 61.819,41.714 ; 26.259,3.233 99.538,3.233 99.538,41.714 ; 26.259,3.233 26.259,41.714 99.538,41.714 ; 99.538,41.714 99.538,46.667 ; 99.538,46.667 26.259,46.667 26.259,87.815 99.538,87.815 99.538,46.667
  text "BIT-LogicRoot Kit" at 30.64,88.684 h6
  text "NPN" at 58.683,88.323 h3
  text "NOT" at 78.202,84.804 h3
  text "BUFFER" at 38.705,84.677 h3
  text "NAND" at 77.44,70.67 h3
  text "AND" at 40.864,70.543 h3
  text "NOR" at 78.202,56.102 h3
  text "OR" at 41.753,55.975 h3
  text "PNP" at 59.346,42.476 h3
  text "NOT" at 78.202,38.703 h3
  text "BUFFER" at 38.705,38.576 h3
  text "NAND" at 77.313,24.823 h3
  text "AND" at 40.864,24.696 h3
  text "OR" at 41.626,12.287 h3
  text "NOR" at 78.075,12.287 h3

## Text inside footprints (layer, text, board x,y; h text height)
SW: Top Overlay "ON" at 21.963,75.407 h1.02 r270; Top Component Outline "1" at 17.363,74.837 h1.02 r270; Top Component Outline "ON" at 21.963,75.407 h1.02 r270
SW-1: Top Overlay "ON" at 21.855,67.843 h1.02 r270; Top Component Outline "ON" at 21.855,67.843 h1.02 r270; Top Component Outline "1" at 17.255,67.273 h1.02 r270
SW-2: Top Overlay "ON" at 21.709,36.672 h1.02 r270; Top Component Outline "ON" at 21.709,36.672 h1.02 r270; Top Component Outline "1" at 17.109,36.102 h1.02 r270